# Altium PCB Digital Clock.PcbDoc (part 2 of 3)
Units mm, origin at the board's own origin, x right, y up, seen from the top; angles counter-clockwise.
Board outline 75 x 75 mm, 4 copper layers (Top Layer, GROUND, POWER, Bottom Layer), stack 1.369 mm thick; 74 components, 63 nets, 278 pads, 114 vias.
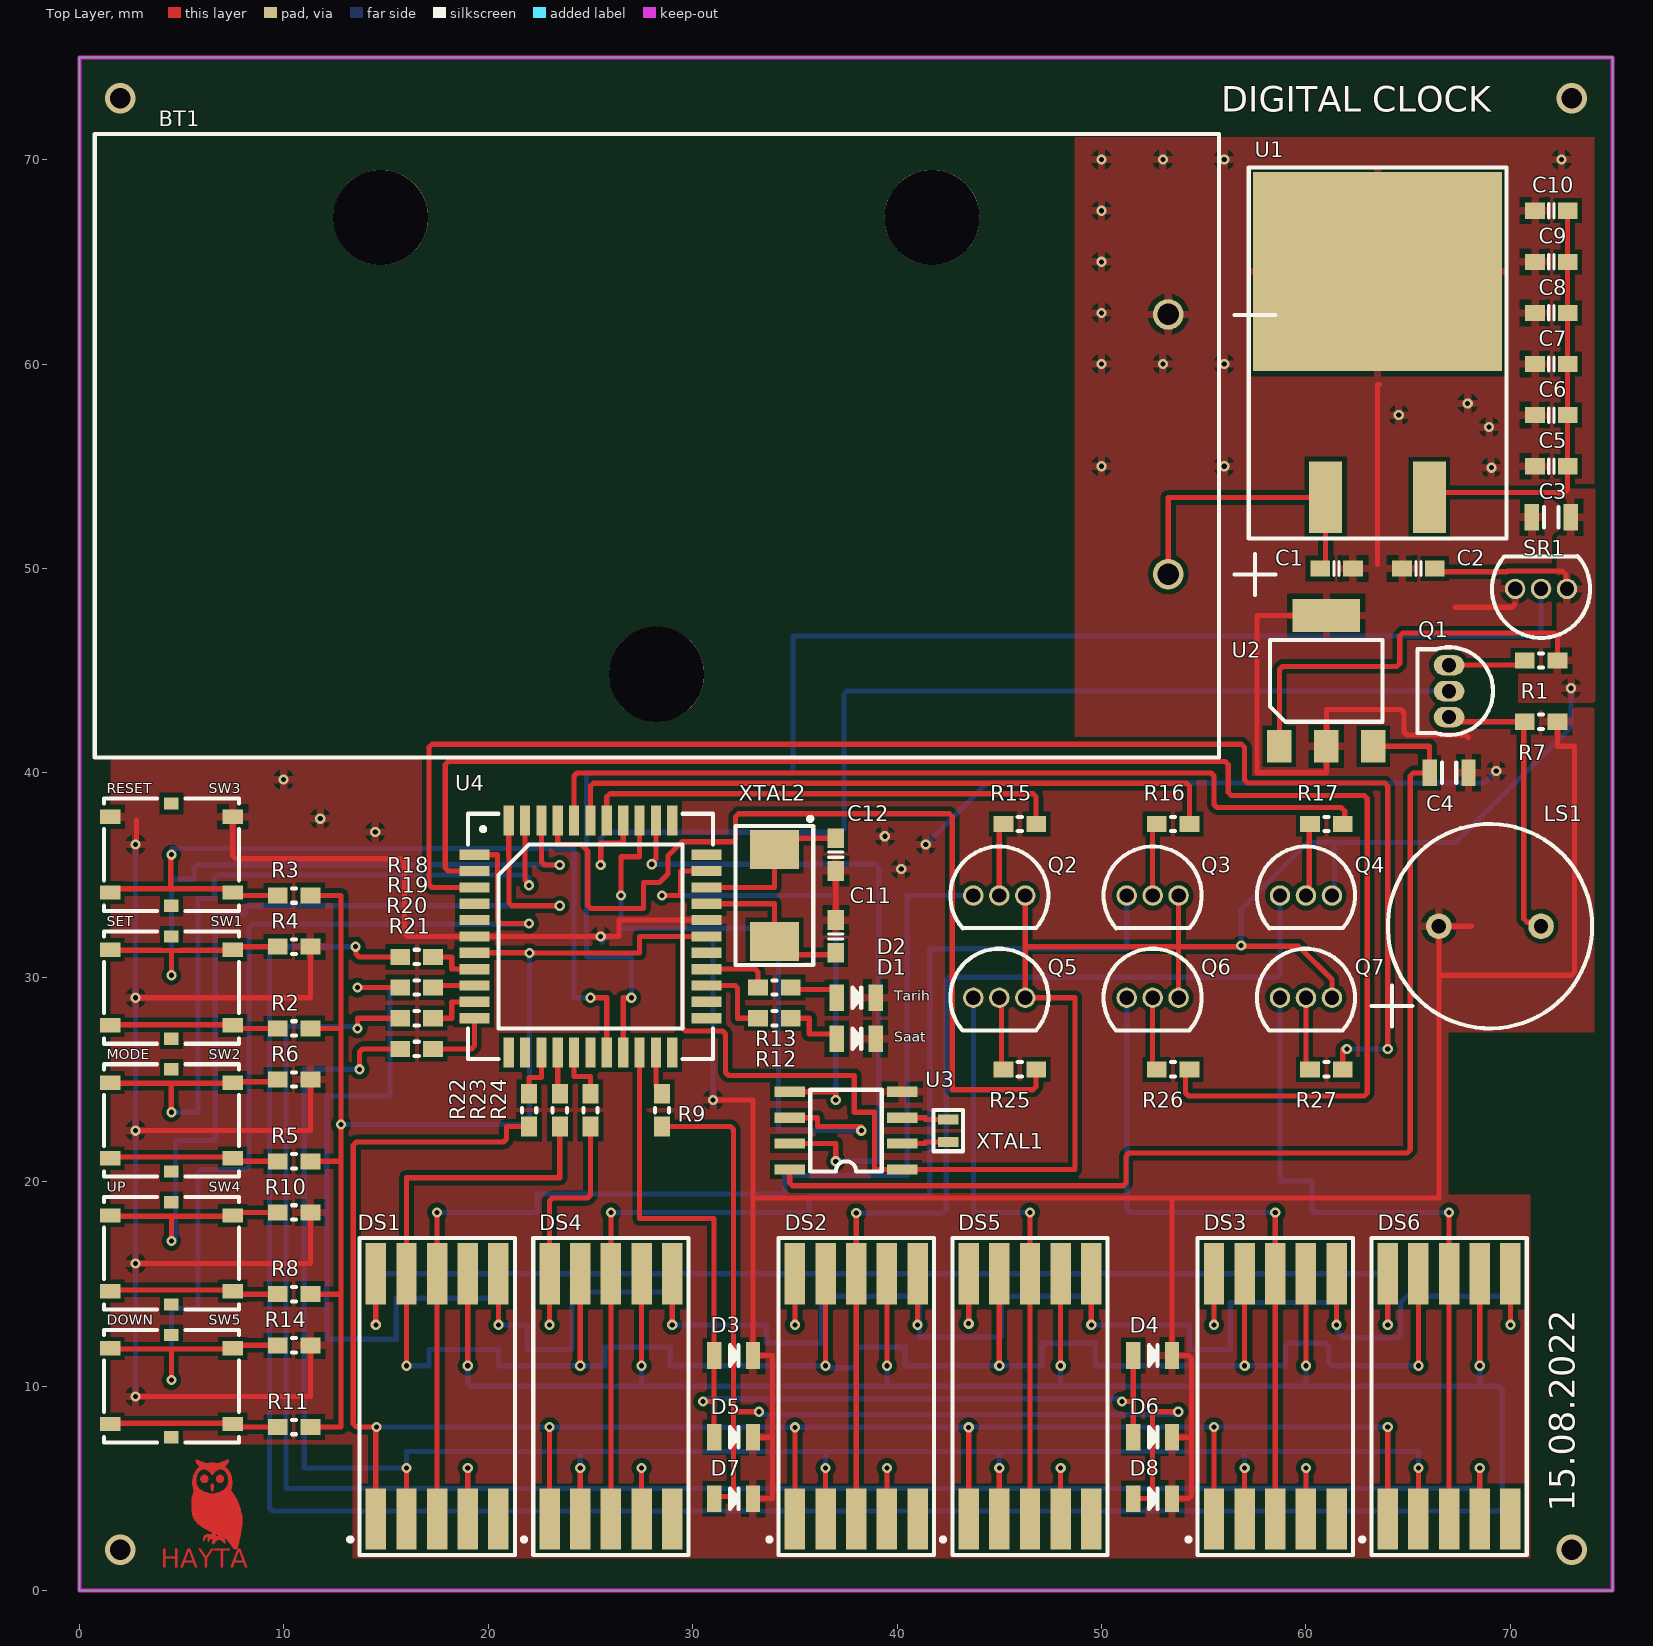
[diagram p0: Top Layer view]

## Via types
v1: diameter 0.5, hole 0.25, Top Layer to Bottom Layer, 110 vias
v2: diameter 1.5, hole 1, Top Layer to Bottom Layer, 4 vias

## Nets (pads, with @x,y where several pads share a name; then routed paths per layer and width w, separated by ;. In a path a pad name is that pad's centre, name@x,y a point inside that pad or via, vN(x,y) a via of type N, cw(c..) or ccw(c..) an arc to the next point about the centre after c; other vN are vias at no path point) (continued)
3V: (continued)
  Top Layer w0.254: U3.8@34.75,20.595 34.75,19.949 34.899,19.8 51.051,19.8 51.2,19.949 51.2,21.251 51.349,21.4 64.951,21.4 65.1,21.549 65.1,39.851 65.249,40 C4.2@66.05,40 66.05,41.3 66,41.3 U2.3@63.3,41.3
5V: C2.2 C3.2 C5.2 C6.2 C7.2 C8.2 C9.2 C10.2 Q2.3 Q3.3 Q4.3 Q5.3 Q6.3 Q7.3 R1.2 R2.2 R3.2 R5.2 R8.2 R11.2 SR1.1 U1.3 U2.1 U3.1 U4.7 U4.28 | length 205.1
  Top Layer w0.254: R11.2@11.3,8 12.8,8 12.8,14.5 ; R8.2@11.3,14.5 12.8,14.5 ; R5.2@11.3,21 12.8,21 ; R2.2@11.3,27.5 12.8,27.5 ; R3.2@11.3,34 12.8,34 12.8,27.5 ; 12.8,15.919 12.8,14.5 ; 12.8,15.981 12.8,21 ; U4.7@19.33,31.2 22,31.2 v1(22.013,31.188) 27.4,31.188 27.4,32 29.5,32 ; U4.28@30.67,32 29.5,32 ; Q2.3@46.27,34 46.27,31.5 ; Q6.3@53.77,29 53.77,31.5 ; Q3.3@53.77,34 53.77,31.5 ; U2.1@58.7,41.3 58.7,45.061 58.849,45.21 64.441,45.21 64.59,45.359 64.59,46.68 64.75,46.84 72.151,46.84 72.3,46.691 R1.2@72.3,45.5 ; Q7.3@61.27,29 61.27,29.887 59.637,31.52 56.87,31.52 v1(56.83,31.56) 56.77,31.5 53.77,31.5 ; U1.3@66.04,53.475 66.285,53.72 72.651,53.72 72.8,53.869 C6.2@72.8,57.5 C7.2@72.8,60 C8.2@72.8,62.5 C9.2@72.8,65 C10.2@72.8,67.5 ; C2.2@66.3,50 66.46,49.84 69.824,49.84 69.865,49.881 72.533,49.881 72.723,49.691 72.723,49.047 SR1.1@72.77,49 ; 12.8,21 v1(12.8,22.8) 12.8,27.5 ; 29.5,32 29.5,27.518 29.649,27.369 31.451,27.369 31.6,27.22 31.6,25.349 31.749,25.2 37.9,25.2 37.9,23.4 38.9,23.4 38.9,20.595 U3.1@40.25,20.595 48.7,20.595 48.7,29 Q5.3@46.27,29 46.27,31.5 ; 46.27,31.5 53.77,31.5
  Bottom Layer w0.254: v1(12.8,22.8) 22.013,22.8 v1(22.013,31.188) ; v1(56.83,31.56) 56.83,33.346 60.084,36.6 61.39,36.6 ; Q4.3@61.27,34 61.39,34.12 61.39,36.6 ; v1(72.97,44.14) 72.97,42.252 67.318,36.6 61.39,36.6
A1: D3.1 D4.1 D5.1 D6.1 U4.20 | length 48.2
  Top Layer w0.254: U4.20@27.4,26.33 27.4,18.2 31.05,18.2 D3.1@31.05,11.5 31.05,9.25 ; v1(30.5,9.25) 31.05,9.25 ; D5.1@31.05,7.5 31.05,9.25 ; v1(51,9.25) 51.55,9.25 ; D6.1@51.55,7.5 51.55,9.25 ; D4.1@51.55,11.5 51.55,9.25
  Bottom Layer w0.254: v1(30.5,9.25) 30.567,9.25 30.698,9.381 50.802,9.381 50.933,9.25 v1(51,9.25)
A2: D7.1 D8.1 R9.2 | length 50.7
  Top Layer w0.254: R9.2@28.5,22.7 31.851,22.7 32,22.551 32,8.75 ; D7.1@31.05,4.5 31.15,4.6 31.851,4.6 32,4.749 32,8.75 ; v1(33.25,8.75) 32,8.75 ; D8.1@51.55,4.5 52.5,4.5 52.5,8.75 v1(53.75,8.75)
  Bottom Layer w0.254: v1(33.25,8.75) 33.317,8.75 33.448,8.619 53.552,8.619 53.683,8.75 v1(53.75,8.75)
B0: DS1.A DS2.A DS3.A DS4.A DS5.A DS6.A R18.2 | length 184
  Top Layer w0.254: v1(13.5,31.5) 13.533,31.467 13.533,31.149 13.682,31 R18.2@15.7,31 ; v1(19,11) DS1.A@19,15.5 ; v1(27.5,11) DS4.A@27.5,15.5 ; v1(39.5,11) DS2.A@39.5,15.5 ; v1(48,11) DS5.A@48,15.5 ; v1(60,11) DS3.A@60,15.5 ; v1(68.5,11) DS6.A@68.5,15.5
  Bottom Layer w0.254: v1(13.5,31.5) 9.3,31.5 9.3,4.049 9.449,3.9 69.451,3.9 69.6,4.049 69.6,9.851 69.451,10 68.5,10 ; v1(19,11) 19,10.149 19.149,10 27.5,10 ; v1(27.5,11) 27.5,10 ; v1(39.5,11) 39.5,10 ; v1(48,11) 48,10 ; v1(60,11) 60,10 ; v1(68.5,11) 68.5,10 ; 27.5,10 39.5,10 ; 39.5,10 48,10 ; 48,10 60,10 ; 60,10 68.5,10
B1: DS1.B DS2.B DS3.B DS4.B DS5.B DS6.B R19.2 | length 122.7
  Top Layer w0.254: v1(13.6,29.5) 14.837,29.5 R19.2@15.7,29.5 ; v1(20.5,13) DS1.B@20.5,15.5 ; v1(29,13) DS4.B@29,15.5 ; v1(41,13) DS2.B@41,15.5 ; v1(49.5,13) DS5.B@49.5,15.5 ; v1(61.5,13) DS3.B@61.5,15.5 ; v1(70,13) DS6.B@70,15.5
  Bottom Layer w0.254: v1(13.6,29.5) 15.2,29.5 15.2,24.2 12.1,24.2 12.1,12.3 15.5,12.3 15.5,14.3 20.5,14.3 v1(20.5,13) 21.9,13 21.9,11.8 24.1,11.8 24.1,14.6 29,14.6 v1(29,13) 33.6,13 33.6,12.1 36.3,12.1 36.3,14.4 41.1,14.4 v1@41.1,13 ; v1(41,13) v1@41.1,13 ; v1(70,13) 70,14.4 64.949,14.4 64.631,14.082 64.631,12.518 64.482,12.369 61.831,12.369 61.542,12.658 61.542,12.958 v1(61.5,13) 61.5,14.1 56.3,14.1 56.3,11.8 54.3,11.8 54.3,13 v1(49.5,13) 49.5,14.4 45.1,14.4 45.1,12.4 41.1,12.4 v1@41.1,13
B2: DS1.C DS2.C DS3.C DS4.C DS5.C DS6.C R20.2 | length 108.2
  Top Layer w0.254: v1(13.6,27.5) 13.6,28 R20.2@15.7,28 ; DS1.C@19,3.5 v1(19,6) ; DS4.C@27.5,3.5 v1(27.5,6) ; DS2.C@39.5,3.5 39.5,5.381 v1(39.5,6) ; DS5.C@48,3.5 v1(48,6) ; DS3.C@60,3.5 v1(60,6) ; DS6.C@68.5,3.5 68.5,5.381 v1(68.5,6)
  Bottom Layer w0.254: v1(13.6,27.5) 13.6,27.6 10.1,27.6 10.1,5 19,5 ; v1(19,6) 19,5 ; v1(27.5,6) 27.5,5 ; v1(39.5,6) 39.5,5 ; v1(48,6) 48,5 ; v1(60,6) 60,5 ; v1(68.5,6) 68.5,5 60,5 ; 19,5 27.5,5 ; 27.5,5 39.5,5 ; 39.5,5 48,5 ; 48,5 60,5
B3: DS1.D DS2.D DS3.D DS4.D DS5.D DS6.D R21.2 | length 99.4
  Top Layer w0.254: v1(13.7,25.5) 13.7,26.351 13.849,26.5 R21.2@15.7,26.5 ; DS1.D@16,3.5 v1(16,6) ; DS4.D@24.5,3.5 v1(24.5,6) ; DS2.D@36.5,3.5 v1(36.5,6) ; DS5.D@45,3.5 v1(45,6) ; DS3.D@57,3.5 v1(57,6) ; DS6.D@65.5,3.5 v1(65.5,6)
  Bottom Layer w0.254: v1(13.7,25.5) 11,25.5 11,6 v1(16,6) 16,6.8 24.5,6.8 ; v1(24.5,6) 24.5,6.8 ; v1(36.5,6) 36.5,6.8 ; v1(45,6) 45,6.8 ; v1(57,6) 57,6.8 ; v1(65.5,6) 65.5,6.8 57,6.8 ; 24.5,6.8 36.5,6.8 ; 36.5,6.8 45,6.8 ; 45,6.8 57,6.8
B4: DS1.E DS2.E DS3.E DS4.E DS5.E DS6.E R22.2 | length 100.7
  Top Layer w0.254: DS1.E@14.5,3.5 14.5,7.8 14.531,7.8 v1(14.531,8) 13.549,8 13.4,8.149 13.4,21.799 13.549,21.948 20.751,21.948 20.9,22.097 20.9,22.7 R22.2@22,22.7 ; DS4.E@23,3.5 v1(23,8) ; DS2.E@35,3.5 v1(35,7.988) ; DS5.E@43.5,3.5 v1(43.5,7.988) ; DS3.E@55.5,3.5 v1(55.5,8) ; DS6.E@64,3.5 v1(64,8)
  Bottom Layer w0.254: v1(14.531,8) v1(23,8) 23.006,7.994 34.994,7.994 v1(35,7.988) ; v1@35,8 35.012,7.988 v1(43.5,7.988) ; v1@43.5,8 v1(55.5,8) v1(64,8)
B5: DS1.F DS2.F DS3.F DS4.F DS5.F DS6.F R23.2 | length 100.7
  Top Layer w0.254: v1(16,11) DS1.F@16,15.5 16,20.2 23.5,20.2 R23.2@23.5,22.7 ; v1(24.5,11) DS4.F@24.5,15.5 ; v1(36.5,11) DS2.F@36.5,15.5 ; v1(45,11) DS5.F@45,15.5 ; v1(57,11) DS3.F@57,15.5 ; v1(65.5,11) DS6.F@65.5,15.5
  Bottom Layer w0.254: v1(16,11) 17.1,11 17.1,11.8 20.5,11.8 20.5,11 v1(24.5,11) 25.7,11 25.7,11.9 28.9,11.9 28.9,11 v1(36.5,11) 36.5,10.9 38,10.9 38,11.9 40.4,11.9 40.4,11 v1(45,11) 47.1,11 47.1,12.1 49.7,12.1 49.7,11 v1(57,11) 59,11 59,11.951 59.149,12.1 60.951,12.1 61.1,11.951 61.1,11.149 61.249,11 v1(65.5,11)
B6: DS1.G DS2.G DS3.G DS4.G DS5.G DS6.G R24.2 | length 88.4
  Top Layer w0.254: v1(14.5,13) DS1.G@14.5,15.5 ; v1(23,13) DS4.G@23,15.5 23,19.051 23.149,19.2 24.851,19.2 25,19.349 R24.2@25,22.7 ; v1(35,13) DS2.G@35,15.5 ; v1(43.5,13.06) DS5.G@43.5,15.5 ; v1(55.5,13) DS3.G@55.5,15.5 ; v1(64,13) DS6.G@64,15.5
  Bottom Layer w0.254: v1(14.5,13) 14.5,15.5 23,15.5 ; v1(23,13) 23,15.5 ; v1(35,13) 35,15.5 ; v1(43.5,13.06) 43.5,15.5 ; v1(55.5,13) 55.5,15.5 ; v1(64,13) 64,15.5 55.5,15.5 ; 23,15.5 35,15.5 ; 35,15.5 43.5,15.5 ; 43.5,15.5 55.5,15.5
BZR: Q1.2 U4.37 | length 52.9
  Top Layer w0.254: v1(25.5,35.5) 25.5,36.554 26.6,36.554 U4.37@26.6,37.67
  Bottom Layer w0.254: v1(25.5,35.5) 25.5,36.818 25.782,37.1 37.251,37.1 37.4,37.249 37.4,43.851 37.549,44 Q1.2@67,44
D0: DS1.VCC Q2.1 | length 56.7
  Top Layer w0.254: DS1.VCC@17.5,3.5 DS1.VCC@17.5,15.5 v1(17.5,18.5)
  Bottom Layer w0.254: v1(17.5,18.5) 22.4,18.5 22.4,19.4 34.5,19.4 34.5,20.3 40.5,20.3 40.5,34 Q2.1@43.73,34
D1: DS4.VCC Q3.1 | length 55.7
  Top Layer w0.254: DS4.VCC@26,3.5 DS4.VCC@26,15.5 v1(26,18.5)
  Bottom Layer w0.254: v1(26,18.5) 35.7,18.5 35.7,19.3 41.6,19.3 41.6,31.4 51.23,31.4 Q3.1@51.23,34
D2: DS2.VCC Q4.1 | length 51
  Top Layer w0.254: DS2.VCC@38,3.5 v1(38,18.469)
  Bottom Layer w0.254: v1(38,18.469) 42.22,18.469 42.4,18.649 42.4,29.851 42.549,30 58.581,30 58.73,30.149 Q4.1@58.73,34
D3: DS5.VCC Q5.1 | length 28.3
  Top Layer w0.254: DS5.VCC@46.5,3.5 DS5.VCC@46.5,15.5 v1(46.5,18.5)
  Bottom Layer w0.254: Q5.1@43.73,29 43.73,18.5 v1(46.5,18.5)
D4: DS3.VCC Q6.1 | length 32.7
  Top Layer w0.254: DS3.VCC@58.5,3.5 DS3.VCC@58.5,15.5 v1(58.5,18.5)
  Bottom Layer w0.254: Q6.1@51.23,29 51.23,18.649 51.379,18.5 v1(58.5,18.5)